# EAGLE board esp_ftdi_breakout (EAGLE 8.4.0)
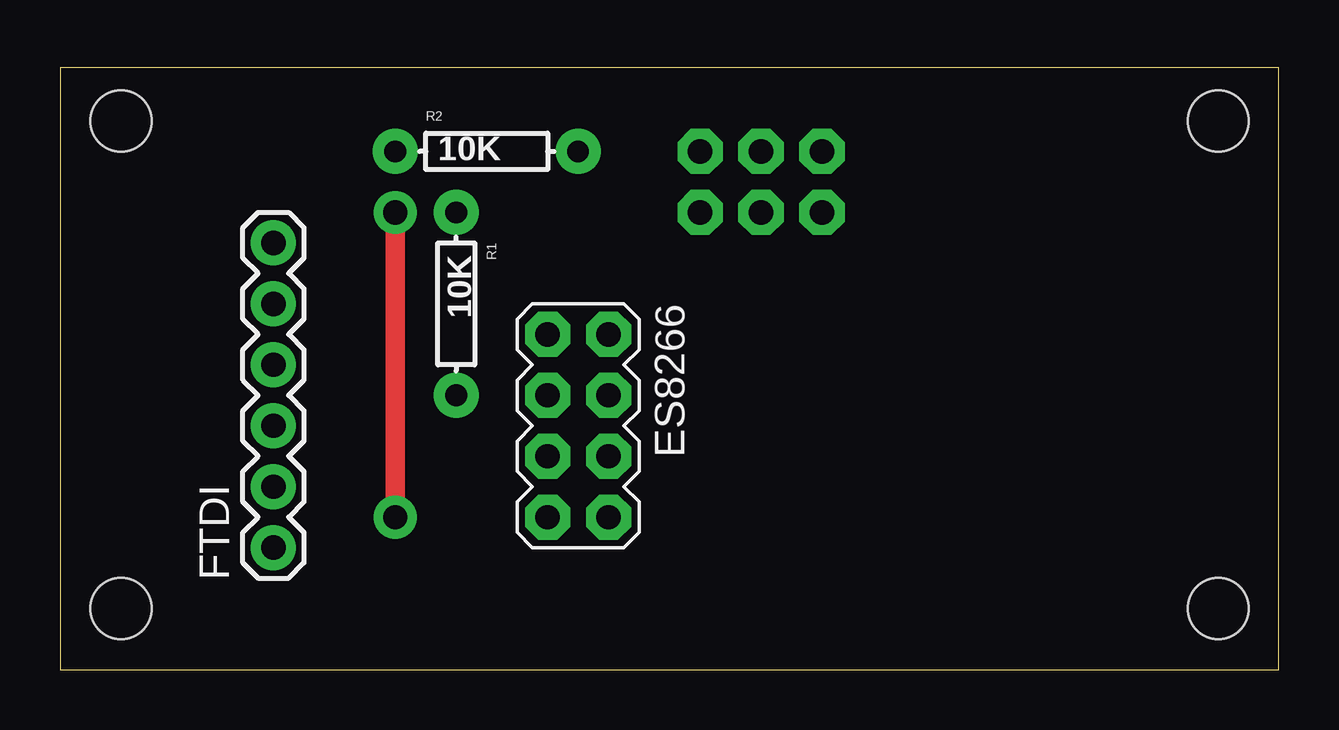
[diagram p0: board, top side]
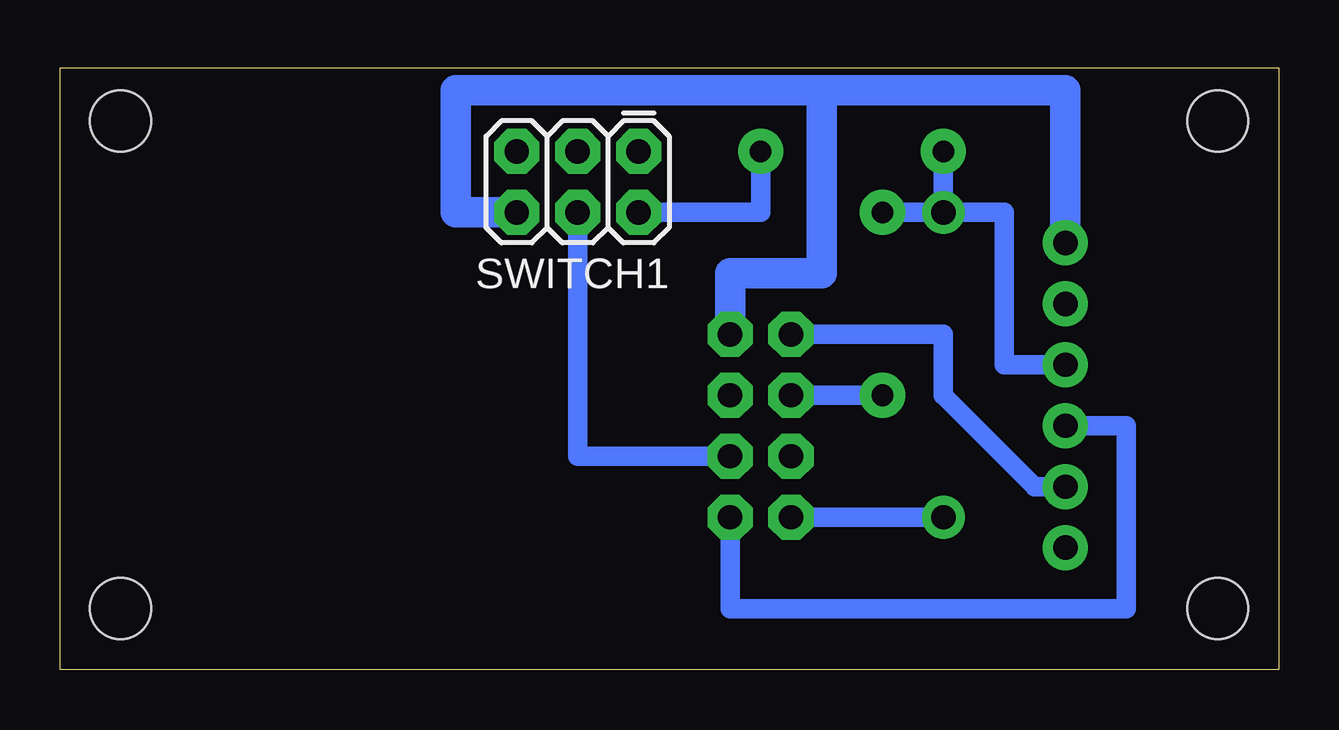
[diagram p1: board, bottom side, seen from below]

Size 50.78 x 25.07 mm. Coordinates in mm from the lower left corner, seen from the top.
Outline: 0,0 50.78,0 50.78,25.07 0,25.07 0,0
Copper layers (1*16): Top 0.035mm / dielectric 1.5mm / Bottom 0.035mm
Design rules "OthermillDRC_1_64_v2": minimum track width 16mil, minimum drill 31mil, track to track 0.39878125mm, track to pad 0.39878125mm, pad to pad 0.39878125mm, via to via 0.39878125mm, smd to smd 0mil, copper to edge 0mil, drill to drill 1mil, minimum pad ring 0mil, minimum via ring 15mil, stop-mask expansion 1mil, vias tented up to drill 30mil, thermal gap 10mil
Holes 2.54 mm at 2.54,2.54 2.54,22.86 48.26,2.54 48.26,22.86

## Footprints (pad centres in the part's own frame; a part is rotated, then mirrored left to right if it is on the bottom)
2X4 = drill 1.016 pad 1.88 octagon: 1 -3.81,-1.27; 2 -3.81,1.27; 3 -1.27,-1.27; 4 -1.27,1.27; 5 1.27,-1.27; 6 1.27,1.27; 7 3.81,-1.27; 8 3.81,1.27
1X06 = drill 1.016 pad 1.88: 1 0,0; 2 2.54,0; 3 5.08,0; 4 7.62,0; 5 10.16,0; 6 12.7,0
AXIAL-0.3 = drill 0.9 pad 1.88: P$1 -3.81,0; P$2 3.81,0
2X3 = drill 1.016 pad 1.88 octagon: 1 0,0; 2 0,2.54; 3 2.54,0; 4 2.54,2.54; 5 5.08,0; 6 5.08,2.54

## Placement (x,y rotation side)
ES8266  [2X4]  21.59,10.16 270 top
FTDI  [1X06]  8.89,5.08 90 top
R1  10K  [AXIAL-0.3]  16.51,15.24 270 top
R2  10K  [AXIAL-0.3]  17.78,21.59 0 top
SWITCH1  SWITCH  [2X3]  26.67,21.59 180 bottom

## Library data of the parts
ES8266 FTDI = SparkFun-Connectors
R1 R2 = SparkFun-Resistors; PROD_ID: RES-12182
SWITCH1 = SparkFun-Connectors; PROD_ID: CONN-11566

## Nets
CH_PD: ES8266.3 R1.P$2
CTS: FTDI.5
DTR: FTDI.1
GND: ES8266.2 FTDI.6 SWITCH1.6
GPIO0: ES8266.6 SWITCH1.4
GPIO2: ES8266.4
N$2: R2.P$2 SWITCH1.2
RST: ES8266.5
RX: ES8266.1 FTDI.2
TX: ES8266.8 FTDI.3
VCC: ES8266.7 FTDI.4 R1.P$1 R2.P$1

## Tracks (layer width: path | path; a pad name or v marks a point on that pad's centre or on a via)
CH_PD
  Bottom 0.813: ES8266.3 R1.P$2
GND
  Bottom 1.27: FTDI.6 8.89,24.13 19.05,24.13 | SWITCH1.6 34.29,19.05 34.29,24.13 19.05,24.13 | ES8266.2 22.86,16.51 19.05,16.51 19.05,24.13
GPIO0
  Bottom 0.813: ES8266.6 29.21,8.89 SWITCH1.4
N$2
  Bottom 0.813: SWITCH1.2 21.59,19.05 R2.P$2
RX
  Bottom 0.813: ES8266.1 13.97,13.97 13.97,11.43 10.16,7.62 FTDI.2
TX
  Bottom 0.813: FTDI.3 6.35,10.16 6.35,2.54 22.86,2.54 ES8266.8
VCC  (via drill 1.02)
  Top 0.813: v13.97,6.35 v13.97,19.05
  Bottom 0.813: ES8266.7 v13.97,6.35 | v13.97,19.05 R1.P$1 | FTDI.4 11.43,12.7 11.43,19.05 v13.97,19.05 | R2.P$1 v13.97,19.05